# Altium PCB Motor Interface.PcbDoc
Units mm, origin at the board's own origin, x right, y up, seen from the top; angles counter-clockwise.
Board outline 152.4 x 101.6 mm, 2 copper layers (Top Layer, Bottom Layer); 3 components, 2 nets, 8 pads, 3 vias.
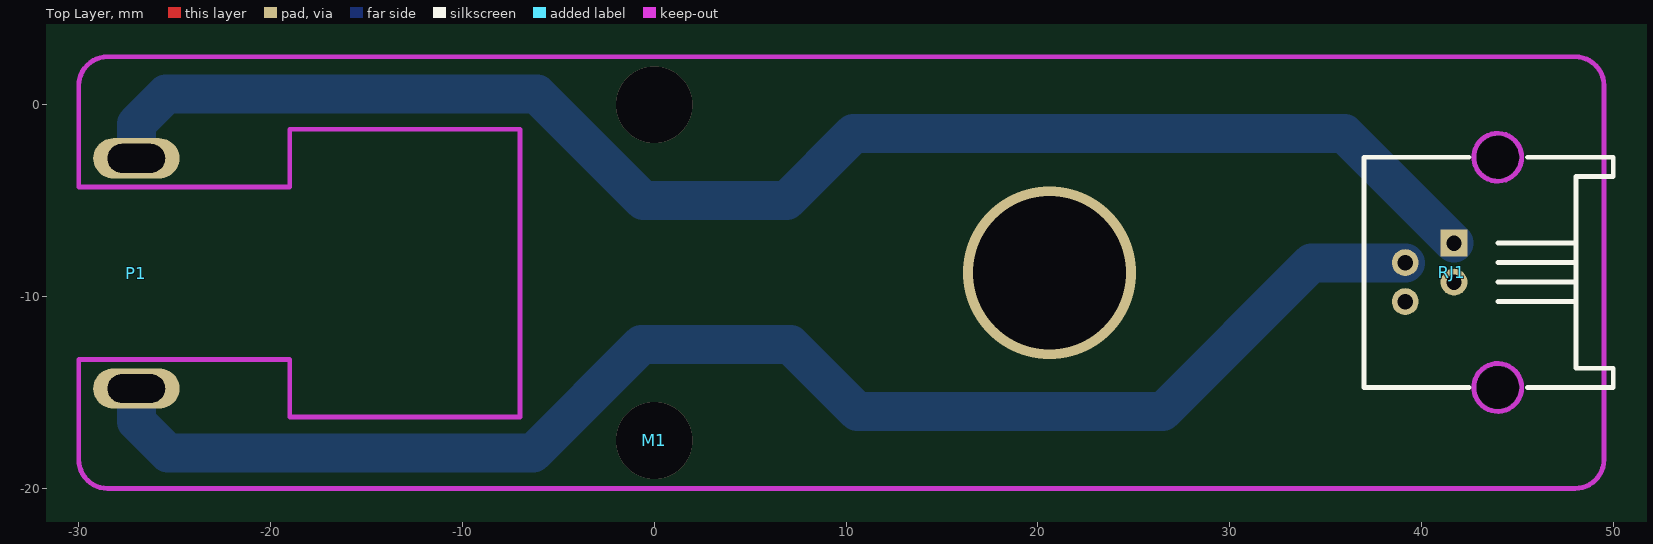
[diagram p0: Top Layer view]
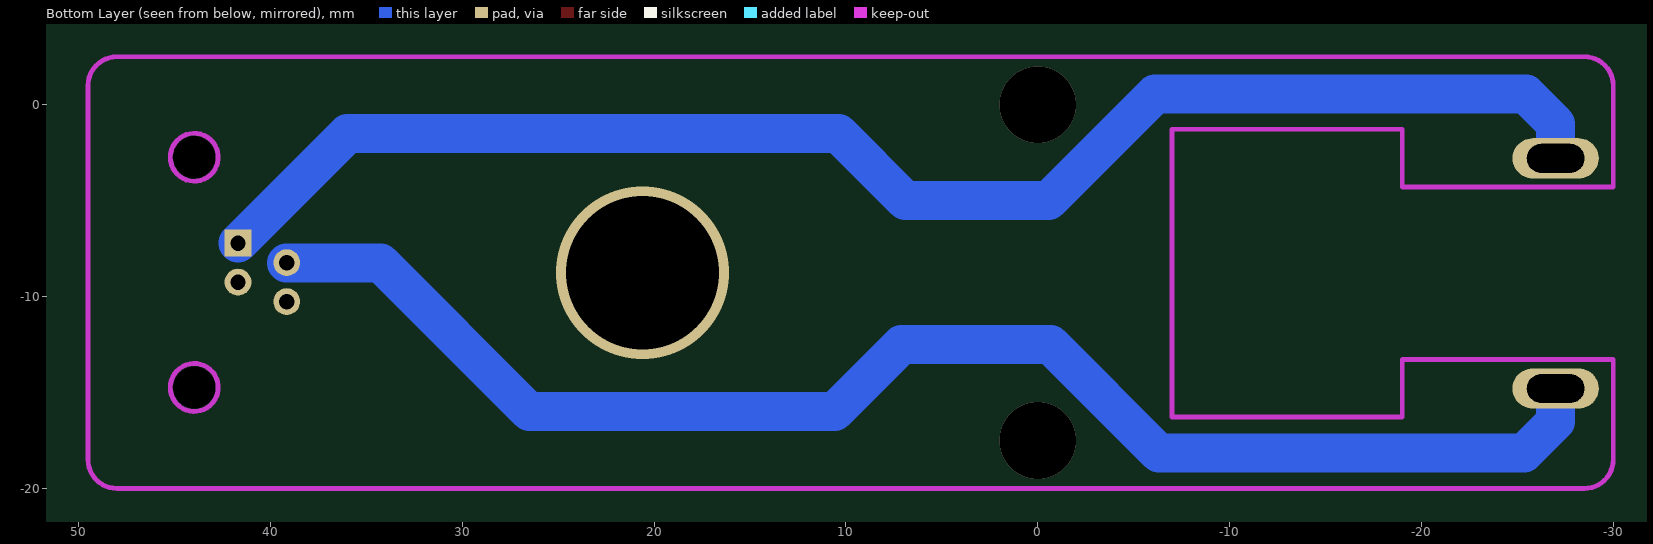
[diagram p1: Bottom Layer view, seen from below]

## Layer stack, top to bottom
Top Solder: solder mask 0.0102, Solder Resist, Dk 3.5
Top Layer: signal copper 0.0356
Dielectric 1: dielectric 0.32, FR-4, Dk 4.8
Bottom Layer: signal copper 0.0356
Bottom Solder: solder mask 0.0102, Solder Resist, Dk 3.5

## Board outline
-72.263,-60.553 80.137,-60.553 80.137,41.047 -72.263,41.047

## Design rules (kind name [scope] priority, off if disabled: settings)
Clearance [All] p1: gap=0.254
PolygonConnect [All] p1: connectstyle=Relief reliefconductorwidth=0.254 reliefentries=4 polygonreliefangle="90 Angle" airgapwidth=0.254
RoutingVias [All] p1: holewidth=0.711 width=1.27 viastyle="Through Hole" minholewidth=0.711 minwidth=1.27 maxholewidth=0.711 maxwidth=1.27
SolderMaskExpansion [All] p1: expansion=0.102
Width [All] p1: maxlimit=2.54 minlimit=0.254 preferedwidth=0.254
29 further rules are at their usual default settings.

## Components (designator, comment, footprint, x,y, rotation, side; value= is the part's Value field where it differs from the comment)
M1 "M3" M 0,-17.5 r0 top
P1 "Header 2H" IO/1 -27,-2.794 r0 top
RJ1 "RJ11" IO/2 41.554,-8.738 r270 top

## Footprints (in the part's own frame and the unit in brackets; to place one, negate y for a bottom-side part, rotate by r counter-clockwise, add the part's x,y. Pads: shape width x height; smd on the part's side, far side on the other; paste and mask are expansions set on the pad)
IO/1 [mm]
  oval 4.5x2.1 hole 1.5 slot 3 at 0 deg: 1(0,0) 2(0,-12)
IO/2 [mm]
  round 2.1 hole 2.2 unplated: 0(-6,2.41) 0(6,2.41)
  rect 1.397x1.397 hole 0.8: 1(-1.524,0.13)
  round 1.397 hole 0.8: 2(-0.508,-2.41) 3(0.508,0.13) 4(1.524,-2.41)
  Keep-Out Layer circle w0.254: c-6,2.41 r1.25
  Keep-Out Layer circle w0.254: c6,2.41 r1.25
  silkscreen extent -6,-4.57 6,8.43
M [mm]

## Part data
P1: "Header, 2-Pin, Right Angle"

## Via types
v1: diameter 4, hole 4, Top Layer to Bottom Layer, 2 vias
v2: diameter 9, hole 8, Top Layer to Bottom Layer, 1 vias

## Nets (pads, with @x,y where several pads share a name; then routed paths per layer and width w, separated by ;. In a path a pad name is that pad's centre, name@x,y a point inside that pad or via, vN(x,y) a via of type N, cw(c..) or ccw(c..) an arc to the next point about the centre after c; other vN are vias at no path point)
NetP1_1: P1.1 RJ1.1 | length 77.2
  Bottom Layer w2.032: P1.1@-27,-2.781 -27,-1 -25.441,0.559 -6.121,0.559 -0.563,-5 6.887,-5 10.387,-1.5 35.971,-1.5 RJ1.1
NetP1_2: P1.2 RJ1.2 | length 75.6
  Bottom Layer w2.032: P1.2@-27,-14.781 -27,-16.5 -25.339,-18.161 -6.325,-18.161 -0.664,-12.5 7.09,-12.5 10.59,-16 26.5,-16 34.258,-8.242 RJ1.2@39.144,-8.242
pads on no net: RJ1.0 RJ1.3 RJ1.4
copper on no net:
  other v1: 0,-17.5 0,0
  other v2: 20.6,-8.75

## Keep-outs
Keep-Out Layer:
  lines w0.254: -30,-18.5 ccw(c-28.5,-18.5) -28.5,-20 48,-20 ccw(c48,-18.5) 49.5,-18.5 49.5,1 ccw(c48,1) 48,2.5 -28.5,2.5 ccw(c-28.5,1) -30,1 -30,-4.281 -19,-4.281 -19,-1.281 -8,-1.281 -7,-1.281 -7,-16.281 -7.5,-16.281 -19,-16.281 -19,-13.281 -30,-13.281 -30,-18.5

## Text inside footprints (layer, text, board x,y; h text height)
RJ1: Mechanical 1 "1" at 43.984,-6.96 h1 r90; Mechanical 1 "2" at 38.396,-7.976 h1 r90; Mechanical 1 "3" at 43.984,-8.992 h1 r90; Mechanical 1 "4" at 38.396,-10.008 h1 r90; Mechanical 1 "1" at 48.556,-6.706 h1 r90; Mechanical 1 "4" at 48.556,-10.262 h1 r90